# Altium PCB uart_key.PcbDoc
Units mm, origin at the board's own origin, x right, y up, seen from the top; angles counter-clockwise.
Board outline 30 x 30 mm, 2 copper layers (Top Layer, Bottom Layer), stack 1.571 mm thick; 22 components, 20 nets, 73 pads, 23 vias.
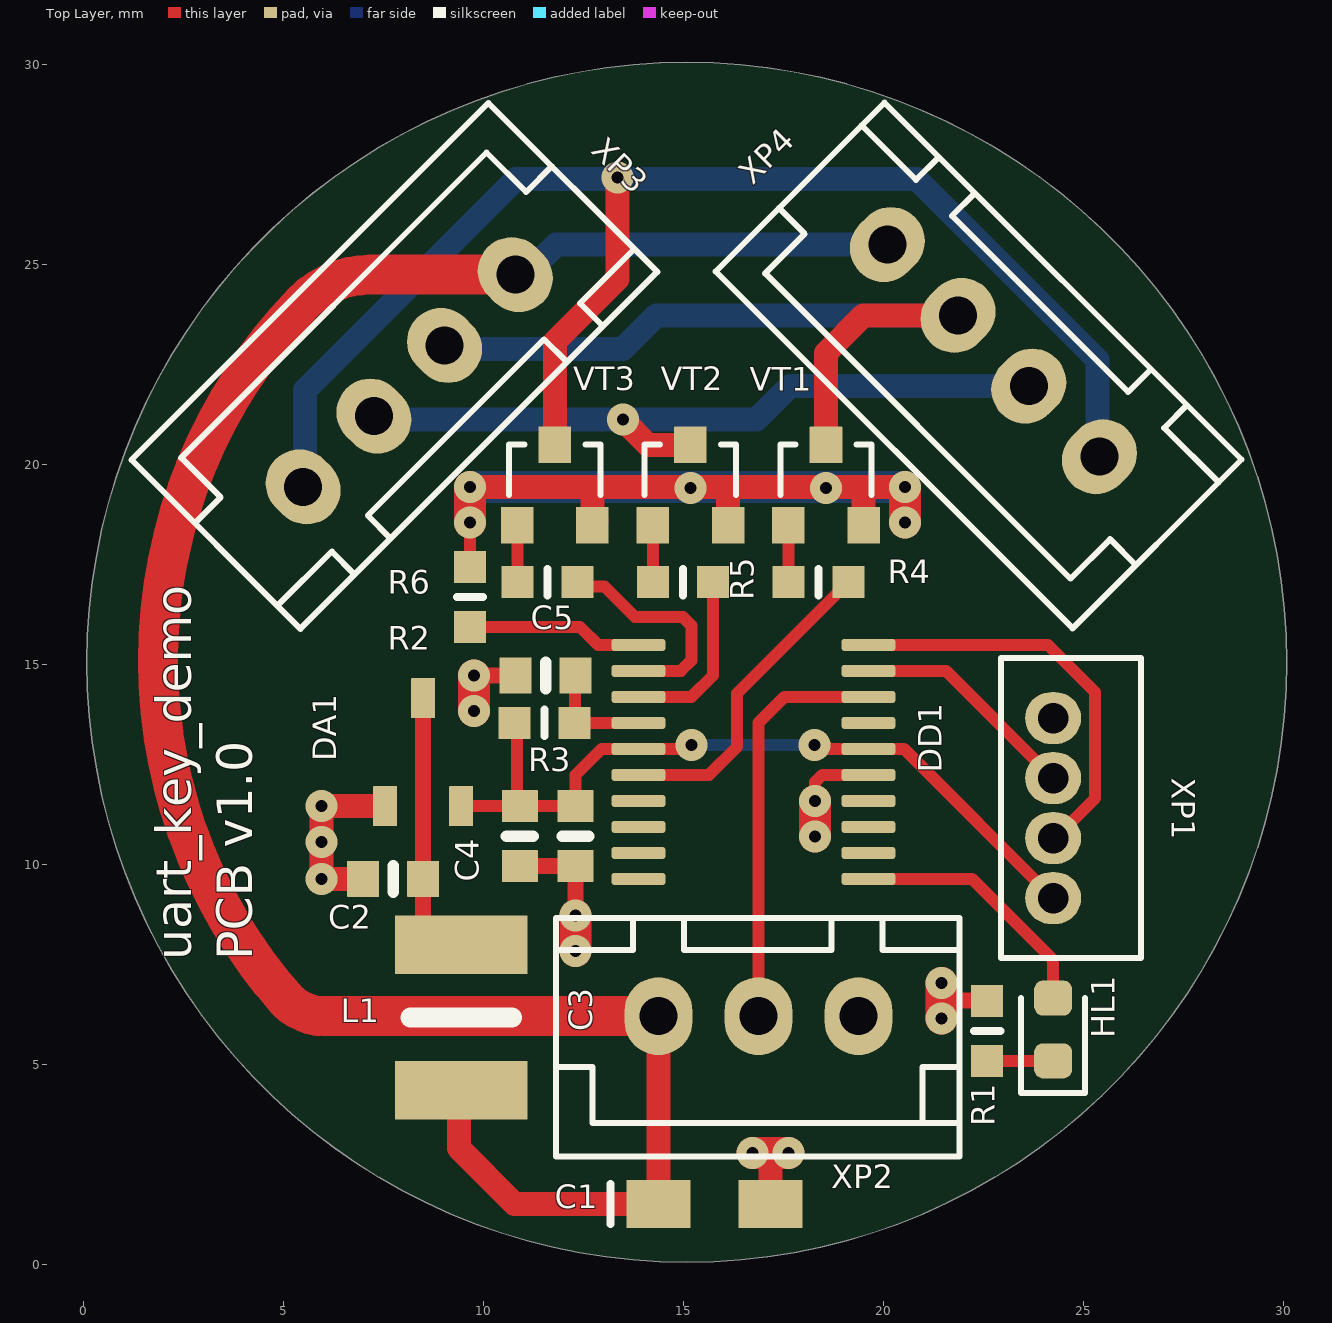
[diagram p0: Top Layer view]
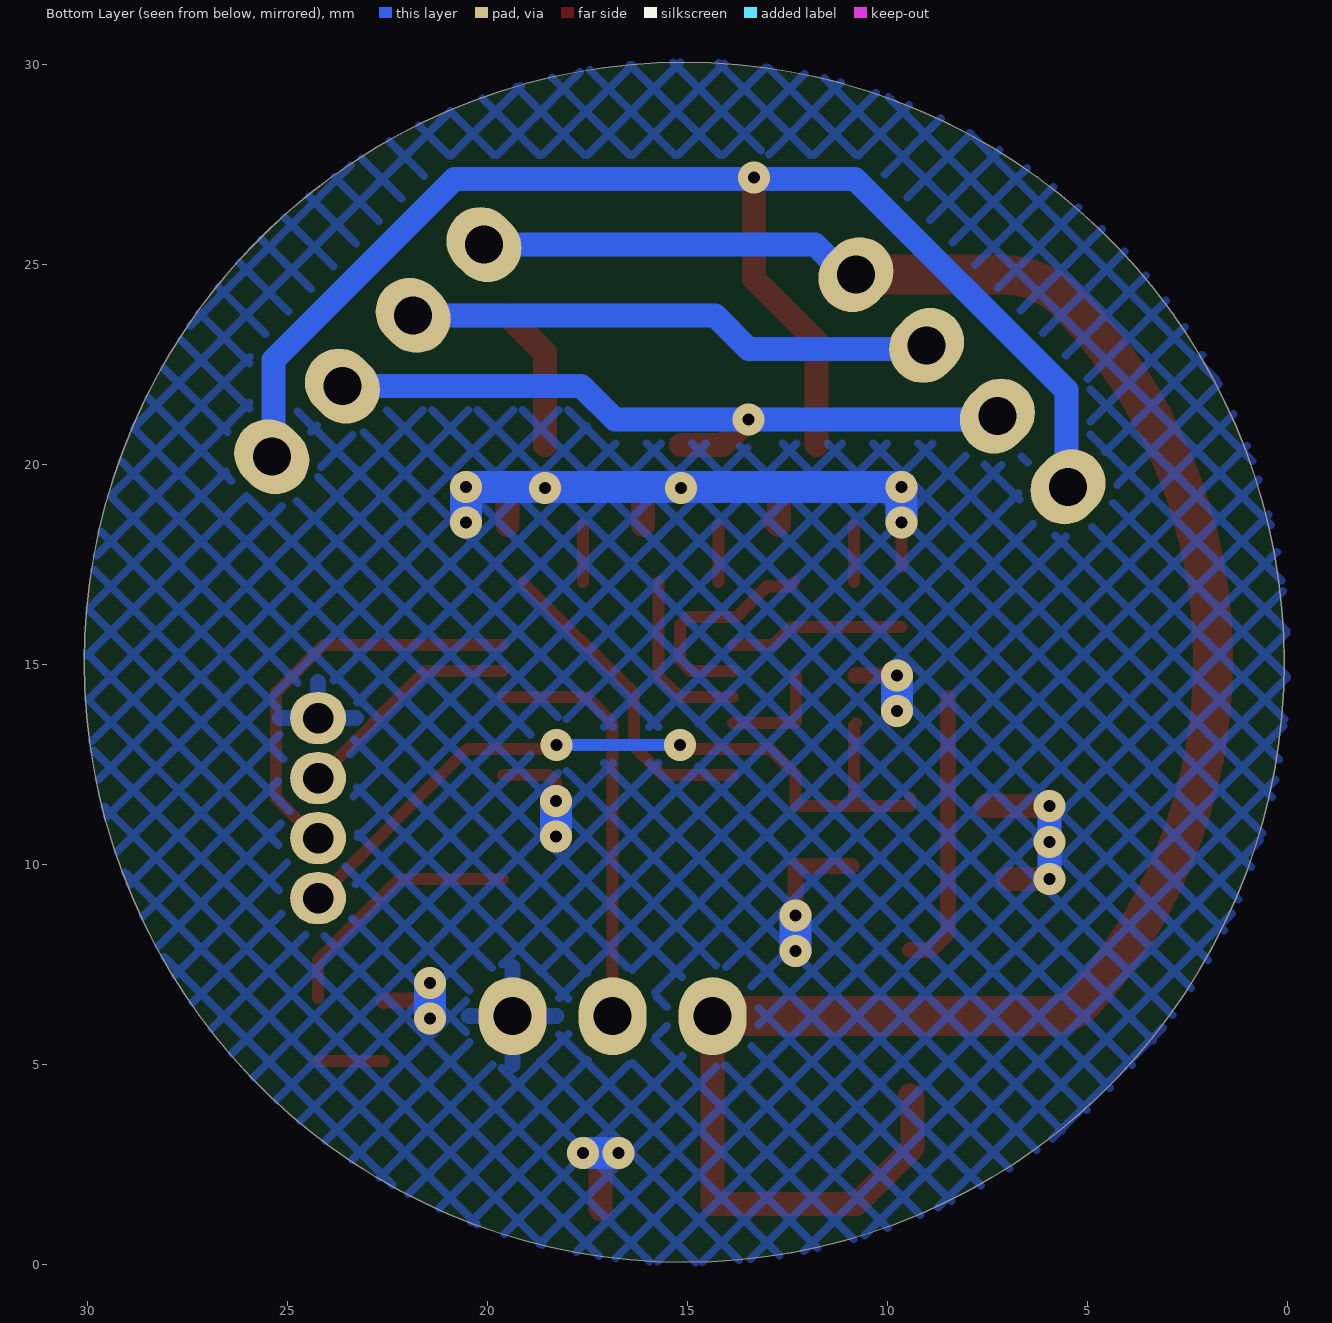
[diagram p1: Bottom Layer view, seen from below]
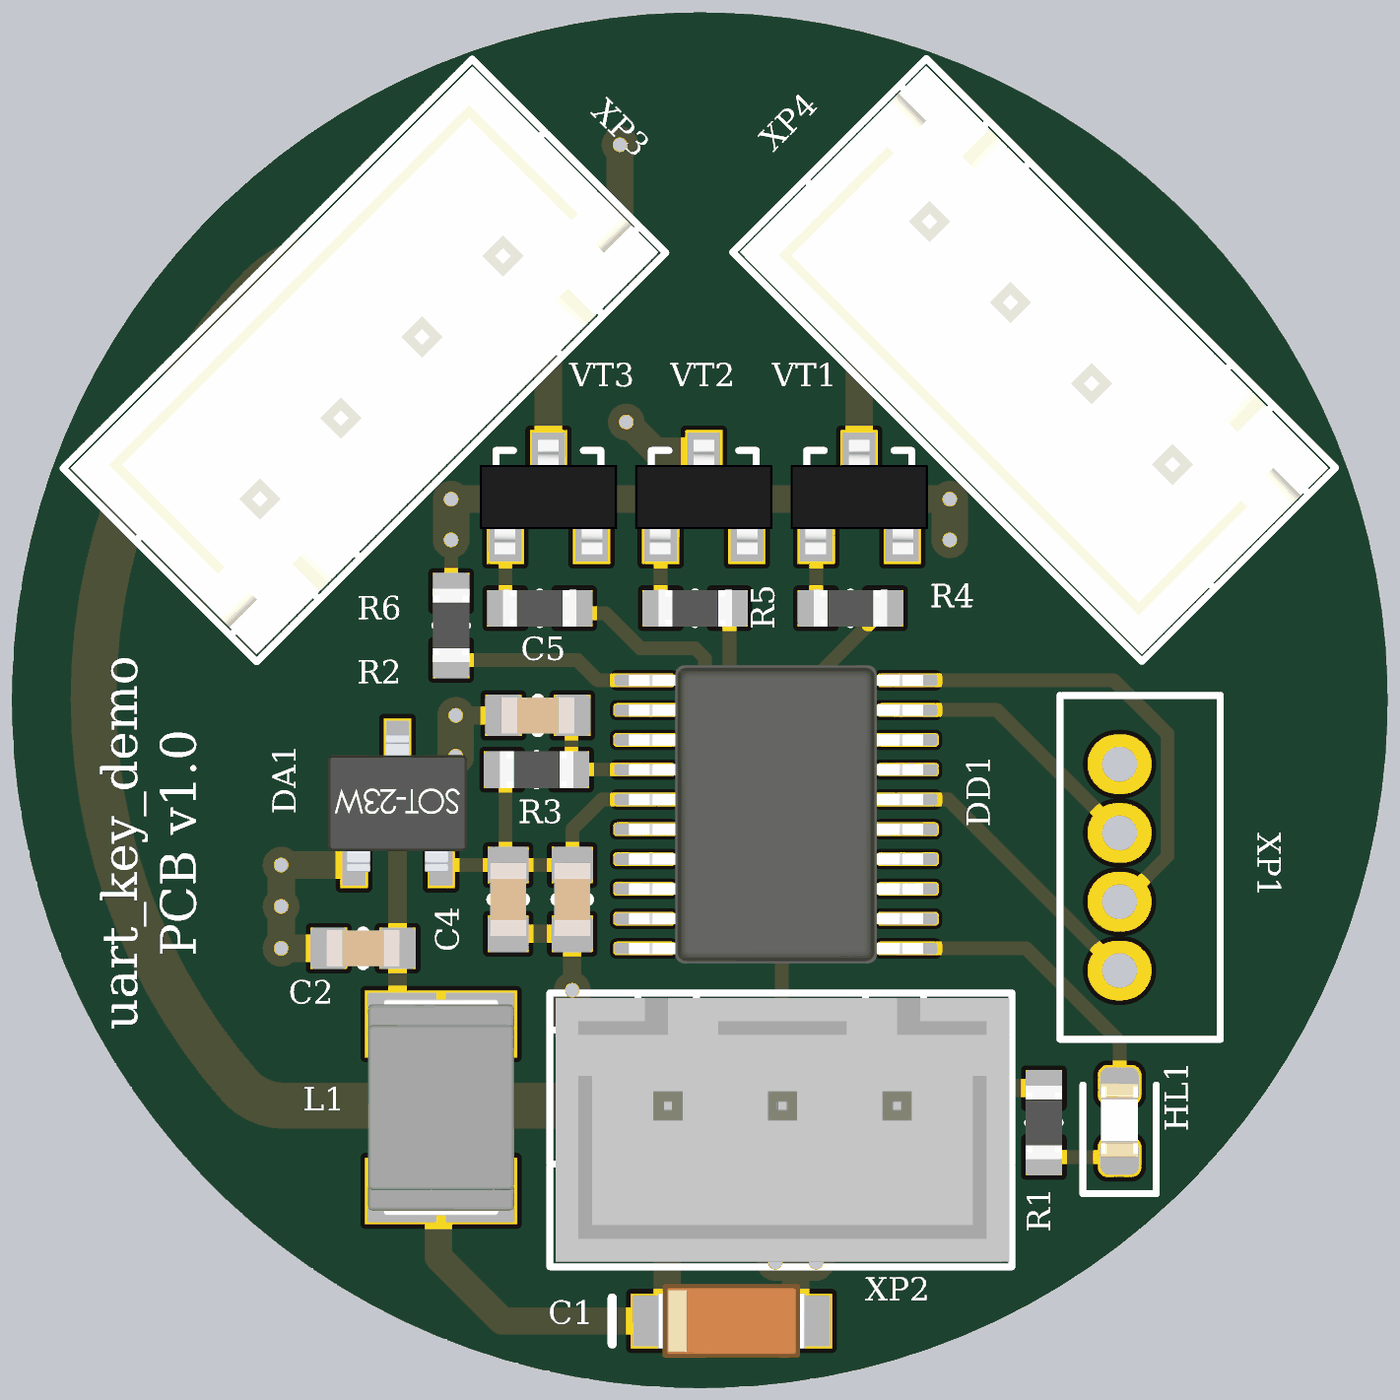
[diagram p2: 3D render of the assembled board from above, using the file's embedded part models]

## Layer stack, top to bottom
Top Solder: solder mask 0.0102, Solder Resist, Dk 3.5
Top Layer: signal copper 0.0356
Dielectric 1: dielectric 1.5, FR-4, Dk 4.8
Bottom Layer: signal copper 0.0356
Bottom Solder: solder mask 0.0102, Solder Resist, Dk 3.5

## Board outline
15.075,0.062 cw(c15.075,15.062) 0.075,15.062 cw(c15.075,15.062) 15.075,30.062 cw(c15.075,15.062) 30.075,15.062 cw(c15.075,15.062)

## Design rules (kind name [scope] priority, off if disabled: settings)
Clearance TestPointToPad [HasFootprint('TP_36_PAD') or HasFootprint('TP_38_PAD') or HasFootprint('TP_47_PAD') or HasFootprint('TP_50_PAD') or HasFootprint('TP_60_PAD') or HasFootprint('TP_80_PAD') or HasFootprint('TP_100_PAD') vs IsPad] p1: gap=0.22 ignorepadtopadclearanceinfootprint=FALSE except(0: Arc-Hole Track-Hole SMDPad-Hole THPad-Hole Via-Hole Fill-Hole Poly-Hole Region-Hole Text-Hole; 2: Arc-THPad Track-THPad SMDPad-THPad THPad-THPad)
Clearance [All] p2: gap=0.2 ignorepadtopadclearanceinfootprint=FALSE
ComponentClearance TestpointClearance [Footprint Like 'TP_36_PAD' or Footprint Like 'TP_38_PAD' or Footprint Like 'TP_47_PAD' or Footprint Like 'TP_50_PAD' or Footprint Like 'TP_60_PAD' or Footprint Like 'TP_80_PAD' or Footprint Like 'TP_100_PAD' vs Footprint Like 'TP_36_PAD' or Footprint Like 'TP_38_PAD' or Footprint Like 'TP_47_PAD' or Footprint Like 'TP_50_PAD' or Footprint Like 'TP_60_PAD' or Footprint Like 'TP_80_PAD' or Footprint Like 'TP_100_PAD'] p1: gap=0 collisioncheckmode=3 verticalgap=0.254 showdistances=FALSE
ComponentClearance [All] p2: gap=0.254 collisioncheckmode=3 verticalgap=0.254 showdistances=FALSE
DiffPairsRouting [All] p1: maxlimit=0.25 minlimit=0.2 mostfreqgap=0.22 toplayer_minwidth=0.2 toplayer_maxwidth=0.25 toplayer_prefwidth=0.22 bottomlayer_minwidth=0.2 bottomlayer_maxwidth=0.25 bottomlayer_prefwidth=0.22 maxuncoupledlength=12.7
HoleSize [All] p1: absolutevalues=TRUE maxlimit=4 minlimit=0.3 maxpercent=80.000 minpercent=20.000
MinimumSolderMaskSliver [All] p1: minsoldermaskwidth=0.1
PasteMaskExpansion [All] p1: expansion=-0.05
PlaneConnect [All] p1: planeconnectstyle=Relief reliefexpansion=0.508 reliefentries=4 reliefconductorwidth=0.4 reliefairgap=0.25
PolygonConnect PolygonConnect_1 [IsVia or InPadClass('Direct')] p1: connectstyle=Direct reliefconductorwidth=0.254 reliefentries=4 polygonreliefangle="90 Angle" airgapwidth=0.254
PolygonConnect [All] p2: connectstyle=Relief reliefconductorwidth=0.4 reliefentries=4 polygonreliefangle="90 Angle" airgapwidth=0.25
RoutingVias [All] p1: holewidth=0.3 width=1 viastyle="Through Hole" minholewidth=0.3 minwidth=0.7 maxholewidth=0.4 maxwidth=2.8
SilkToSilkClearance [All] p1: silktosilkclearance=0.2
SilkToSolderMaskClearance [IsPad] p1: minsilkscreentomaskgap=0.2 clearancetoexposedcopper=TRUE
SolderMaskExpansion [All] p1: expansion=0.1 istentingtop=FALSE
Width [All] p1: maxlimit=4 minlimit=0.22 preferedwidth=0.4
22 further rules are at their usual default settings.

## Components (designator, comment, footprint, x,y, rotation, side; value= is the part's Value field where it differs from the comment)
C1 "2.2uF 16V" TANT_3.2X1.6_A 15.766,1.524 r0 top value=2.2uF
C2 "10uF 25V" CC0603_0.8mm 7.734,9.652 r180 top value=10uF
C3 "10uF 25V" CC0603_0.8mm 12.294,10.718 r270 top value=10uF
C4 "0.15uF 50V" CC0603_0.8mm 10.897,10.718 r270 top value=0.15uF
C5 "1uF 25V" CC0603_0.8mm 11.544,14.732 r180 top value=1uF
DA1 "MCP1703T-3302E/CB" SOT-23A_MCP 8.484,12.818 r270 top value=3.3V
DD1 "STM32F042F6" TSSOP-20_ST 16.739,12.573 r270 top
HL1 "led_1608_green" led_1608 24.232,5.1 r90 top
L1 "LQH43C 15uH" LQH43C 9.434,6.181 r90 top value=15uH
R1 "10k ±1%" R0603 22.581,5.85 r90 top value=10k
R2 "10k ±1%" R0603 9.652,16.693 r270 top value=10k
R3 "10k ±1%" R0603 11.518,13.548 r0 top value=10k
R4 "100 ±1%" R0603 18.363,17.069 r180 top value=100
R5 "100 ±1%" R0603 14.974,17.069 r180 top value=100
R6 "100 ±1%" R0603 11.585,17.069 r180 top value=100
VT1 "IRLML2060" SOT-23 18.553,19.494 r270 top
VT2 "IRLML2060" SOT-23 15.164,19.494 r270 top
VT3 "IRLML2060" SOT-23 11.775,19.494 r270 top
XP1 "ST-Link" B4B-ZR 24.232,9.168 r90 top
XP2 "IN" JST_XH_B3B-XH-A_1x03_P2.50mm_Vertical 14.366,6.216 r0 top
XP3 "LED" JST_XH_B4B-XH-A_1x04_P2.50mm_Vertical 10.785,24.755 r225 top
XP4 "LED" JST_XH_B4B-XH-A_1x04_P2.50mm_Vertical 20.086,25.507 r315 top

## Footprints (in the part's own frame and the unit in brackets; to place one, negate y for a bottom-side part, rotate by r counter-clockwise, add the part's x,y. Pads: shape width x height; smd on the part's side, far side on the other; paste and mask are expansions set on the pad)
B4B-ZR [mm]
  oval 1.3x1.4 hole 0.762: 1(0,0) 2(1.5,0) 3(3,0) 4(4.5,0)
  silkscreen extent -1.5,-2.2 6,1.3, body extent -1.5,-2.2 6,1.3, height 4.5
CC0603_0.8mm [mm] "Yageo/ Radiused inverted home plate (RIHP) paste"
  rrect2% 0.8x0.9 smd paste-2: 1(-0.75,0) 2(0.75,0)
  Top Layer pour cut-out: -0.375,0.65 -0.375,-0.65 0.375,-0.65 0.375,0.65
  silkscreen extent 0,-0.33 0,0.33, body extent -0.8,-0.4 0.8,0.4, height 0.78
JST_XH_B3B-XH-A_1x03_P2.50mm_Vertical [mm]
  oval 1.7x1.95 hole 0.95: 1(0,0) 2(2.5,0) 3(5,0)
  silkscreen extent -2.56,-3.51 7.52,2.46, body extent -2.44,-3.4 7.46,2.35, height 7
JST_XH_B4B-XH-A_1x04_P2.50mm_Vertical [mm]
  oval 1.7x1.95 hole 0.95: 1(0,0) 2(2.5,0) 3(5,0) 4(7.5,0)
  silkscreen extent -2.56,-3.51 10.06,2.46, body extent -2.45,-3.4 9.95,2.35, height 7
led_1608 [mm]
  rrect50% 0.875x0.95 smd: 1(0,0) 2(1.57,0)
  silkscreen extent -0.8,-0.8 1.57,0.8, body extent 0,-0.4 1.6,0.4, height 1.1
LQH43C [mm] "Chip Inductor, 2-Leads, Body 4,50x3,20mm, IPC High Density"
  rect 1.46x3.32 smd paste-25: 1(-1.82,0) 2(1.82,0)
  silkscreen extent 0,-1.27 0,1.27, body extent -2.35,-1.6 2.35,1.6, height 2.6
R0603 [mm]
  rect 0.8x0.8 smd paste-2: 1(-0.75,0) 2(0.75,0)
  Top Layer pour cut-out: -0.5,0.6 0.5,0.6 0.5,-0.6 -0.5,-0.6
  Top Layer pour cut-out: -0.5,0.6 -0.5,-0.6 0.5,-0.6 0.5,0.6
  silkscreen extent 0,-0.33 0,0.33, body extent -0.8,-0.4 0.8,0.4, height 0.37
SOT-23 [mil]
  rrect2% 36x32 smd: 1(39.5,-37) 2(39.5,37) 3(-39.5,0)
  silkscreen extent -40,-45 10,45, body extent -49,-59 49,59, height 43
SOT-23A_MCP [mm] "Посадочное место под SOT-23A. Рекомендации MicroChip"
  rrect2% 1x0.6 smd: 1(1.35,-0.95) 2(1.35,0.95) 3(-1.35,0)
  body extent -1.5,-1.52 1.5,1.52, height 1.32
TANT_3.2X1.6_A [mm]
  rrect2% 1.6x1.2 smd: 1(1.4,0) 2(-1.4,0)
  silkscreen extent -2.6,-0.5 -2.6,0.5, body extent -1.6,-0.8 1.6,0.8, height 1.6
TSSOP-20_ST [mm] "TSSOP, 20-Leads, Body 6.50x4.40mm, Pitch 0.65mm, ST recommend footprint"
  rrect50% 0.3x1.35 smd paste-0.025 mask+0.075: 1(-2.925,-2.875) 2(-2.275,-2.875) 3(-1.625,-2.875) 4(-0.975,-2.875) 5(-0.325,-2.875) 6(0.325,-2.875) 7(0.975,-2.875) 8(1.625,-2.875) 9(2.275,-2.875) 10(2.925,-2.875) 11(2.925,2.875) 12(2.275,2.875) 13(1.625,2.875) 14(0.975,2.875) 15(0.325,2.875) 16(-0.325,2.875) 17(-0.975,2.875) 18(-1.625,2.875) 19(-2.275,2.875) 20(-2.925,2.875)
  body extent -3.25,-3.21 3.25,3.21, height 0.98

## Part data
C1: library part Capacitor_elec, Tolerance=±10%, Voltage=16V, Link1=https://www.chipdip.ru/product0/9000686417, Name=Capacitor_elec, Type="Конденсатор электр."
C2 C3 C5: library part Capacitor, Tolerance=±10%, Voltage=25V, Name=Capacitor, Type="Конденсатор керам."
  C2 C3: Link1=https://www.chipdip.ru/product/grm188r61e106m
  C5: Link1=https://www.chipdip.ru/product/grm188r71e105ka12d
C4: library part Capacitor, Tolerance=±10%, Voltage=50V, Link1=https://www.chipdip.ru/product0/9000081151, Name=Capacitor, Type="Конденсатор керам."
DD1: "ARM-based 32-bit MCU, up to 32 KB Flash, crystal-less USB  FS 2.0, CAN, 8 timers, ADC & comm. interfaces, 2.0 - 3.6 V", Name=STM32F042F6, Type=Микроконтроллер
L1: library part Inductor, Link1=https://www.chipdip.ru/product/lqh43mn150k, Name=LQH43C, Type=Индуктивность
R1 R2 R3 R4 R5 R6: library part Res_0603, Tolerance=±1%, Name=R0603, Type="Резистор SMD"
  R1 R2 R3: Link1=https://www.chipdip.ru/product0/9000079736
  R4 R5 R6: Link1=https://www.chipdip.ru/product0/9000079616
XP1: library part B4B-ZR_conn_01x04_st_link, Circuit_1=Vcc, Circuit_2=CLK, Circuit_3=DIO, Circuit_4=Gnd, Link1=https://www.chipdip.ru/product/b4b-zr, Name=B4B-ZR, Type=Разъём
XP2: library part JST_XH_B3B-XH-A_1x04_P2.50mm_Vertical_1, Circuit_1=+5V, Circuit_2=Rx, Circuit_3=Gnd, Link1=https://www.chipdip.ru/product/sct2501wv-03p-b3b-xh-a, Link2=https://www.chipdip.ru/product/sct2501h-03p-xhp-3, Link3=https://www.chipdip.ru/product/sxh-001t-0.6?from=rec_product, Name=JST_XH_B4B-XH-A_1x04_P2.50mm_Vertical, Type=Разъём
XP3 XP4: library part JST_XH_B4B-XH-A_1x04_P2.50mm_Vertical, Circuit_1=+5Vout, Circuit_2=led_r, Circuit_3=led_g, Circuit_4=led_b, Link1=https://www.chipdip.ru/product/b4b-xh-a, Link2=https://www.chipdip.ru/product/xhp-4?from=rec_product, Link3=https://www.chipdip.ru/product/sxh-001t-0.6?from=rec_product, Name=JST_XH_B4B-XH-A_1x04_P2.50mm_Vertical, Type=Разъём
DA1: Link1=https://www.chipdip.ru/product/mcp1703t-3302e-cb-3, Name=MCP1703T-3302E/CB, Type=LDO
HL1: Link1=https://www.chipdip.ru/product/to-1608bc-pg, Name=led_1608_green, Type=Светодиод
VT1 VT2 VT3: Link1=https://www.chipdip.ru/product/irlml2060trpbf, Name=IRLML2060, Type="MOSFET N-chanel"

## Via types
v1: diameter 0.8, hole 0.3, Top Layer to Bottom Layer, tented both sides, 23 vias

## Nets (pads, with @x,y where several pads share a name; then routed paths per layer and width w, separated by ;. In a path a pad name is that pad's centre, name@x,y a point inside that pad or via, vN(x,y) a via of type N, cw(c..) or ccw(c..) an arc to the next point about the centre after c; other vN are vias at no path point)
+3.3V: C3.1 C4.1 DA1.2 DD1.5 DD1.16 R3.1 XP1.1 | length 19.9
  Top Layer w0.3: DA1.2@9.434,11.668 DA1.2 C4.1 ; R3.1 10.832,13.484 10.832,11.532 C4.1 ; v1(15.189,12.998) 15.054,12.998 14.954,12.898 12.944,12.898 12.294,12.248 C3.1 C4.1 ; v1@18.27,13.124 18.405,13.124 18.632,12.898 20.502,12.898 XP1.1
  Bottom Layer w0.3: v1(15.189,12.998) v1(18.27,12.998)
+5V: C1.2 L1.1 XP2.1 XP3.1 XP4.1 | length 55.3
  Top Layer w0.6: L1.1@9.434,4.234 9.373,4.173 9.373,2.921 10.77,1.524 C1.2 XP2.1
  Top Layer w1: XP3.1 7.149,24.755 ccw(c7.149,22.404) 5.487,24.066 ccw(c14.694,15.116) 5.08,6.604 ccw(c6.017,7.541) 6.017,6.216 XP2.1
  Bottom Layer w0.6: XP3.1 11.057,24.755 11.809,25.507 XP4.1
CLK: DD1.20 XP1.2 | length 10.3
  Top Layer w0.3: DD1.20 24.101,15.498 25.282,14.317 25.282,11.668 24.282,10.668 XP1.2
DIO: DD1.19 XP1.3 | length 5.7
  Top Layer w0.3: DD1.19 21.552,14.848 XP1.3
GND: C1.1 C2.2 C3.2 C4.2 C5.2 DA1.1 DD1.15 R1.2 R2.1 VT1.2 VT2.2 VT3.2 XP1.4 XP2.3 | length 52.7
  Top Layer w0.3: R2.1 v1(9.652,18.559) ; v1(18.283,11.598) 18.283,12.072 18.459,12.248 DD1.15
  Top Layer w0.4: v1(9.754,14.732) C5.2 ; C4.2 C3.2 v1(12.294,8.738) ; v1(18.283,10.709) v1@18.392,10.709 ; v1(21.438,6.156) v1@21.546,6.156 ; 21.438,6.604 22.577,6.604 R1.2
  Top Layer w0.6: C2.2 v1(5.944,9.652) v1(5.944,10.566) v1(5.944,11.468) DA1.1 ; v1(9.652,19.448) 12.715,19.448 ; VT3.2@12.821,18.598 VT3.2 12.715,19.448 ; VT2.2 16.104,19.289 ; C1.1@17.166,1.397 C1.1 17.166,2.8 ; VT1.2 19.493,19.448 ; v1(20.528,19.448) 19.493,19.448 ; 12.715,19.448 19.493,19.448
  Top Layer w0.8: v1(9.652,18.559) v1(9.652,19.448) ; v1(9.754,13.843) v1(9.754,14.732) ; v1(12.294,7.849) v1(12.294,8.738) ; v1(16.721,2.8) 17.166,2.8 v1(17.61,2.8) ; v1(18.283,10.709) v1(18.283,11.598) ; v1(20.528,18.559) v1(20.528,19.448) ; v1(21.438,6.156) 21.438,6.604 v1(21.438,7.044)
  Bottom Layer w0.6: v1(5.944,9.652) v1(5.944,10.566) v1(5.944,11.468)
  Bottom Layer w0.8: v1(9.652,18.559) v1(9.652,19.448) v1(20.528,19.448) v1(20.528,18.559) ; v1(9.754,13.843) v1(9.754,14.732) ; v1(12.294,7.849) v1(12.294,8.738) ; v1(16.721,2.8) v1(17.61,2.8) ; v1(18.283,10.709) v1(18.283,11.598) ; v1(21.438,6.156) v1(21.438,7.044)
  other v1: 15.164,19.423 18.553,19.423
led_b_on: DD1.2 R6.1 | length 5.6
  Top Layer w0.3: R6.1 12.441,16.963 13.009,16.963 13.779,16.193 14.979,16.193 15.189,15.982 15.189,15.113 14.924,14.848 DD1.2
led_b_power: VT3.3 XP3.4 XP4.4 | length 36.1
  Top Layer w0.6: VT3.3 11.775,23.082 13.335,24.642 v1(13.335,27.178)
  Bottom Layer w0.6: XP3.4 5.527,19.497 5.527,21.866 10.806,27.145 20.817,27.145 25.344,22.618 25.344,20.249 XP4.4
led_g_on: DD1.3 R5.1 | length 4.4
  Top Layer w0.3: DD1.3 15.189,14.198 15.723,14.732 R5.1@15.723,17.068
led_g_power: VT2.3 XP3.3 XP4.3 | length 18.7
  Top Layer w0.6: v1(13.472,21.131) 14.105,20.498 VT2.3
  Bottom Layer w0.6: XP3.3 7.338,21.131 v1(13.472,21.131) 16.813,21.131 17.653,21.971 XP4.3
led_r_on: DD1.6 R4.1 | length 8
  Top Layer w0.3: DD1.6 15.626,12.248 16.332,12.954 16.332,14.288 R4.1
led_r_power: VT1.3 XP3.2 XP4.2 | length 19.2
  Top Layer w0.6: VT1.3 18.553,22.799 19.493,23.739 XP4.2
  Bottom Layer w0.6: XP3.2 9.34,22.987 9.429,22.899 13.472,22.899 14.312,23.739 XP4.2
NetC2_1: C2.1 DA1.3 L1.2 | length 7
  Top Layer w0.4: DA1.3 C2.1 8.484,8.304 8.914,7.874 L1.2@9.434,7.874
NetC5_1: C5.1 DD1.4 R3.2 | length 2.8
  Top Layer w0.3: C5.1 12.281,14.719 12.281,13.561 12.294,13.548 DD1.4
NetDD1_1: DD1.1 R2.2 | length 4.4
  Top Layer w0.3: R2.2 12.408,15.943 12.852,15.498 DD1.1
NetDD1_11: DD1.11 HL1.2 | length 6.4
  Top Layer w0.3: DD1.11 22.204,9.648 24.232,7.62 HL1.2
NetHL1_1: HL1.1 R1.1 | length 1.7
  Top Layer w0.3: R1.1 HL1.1
NetR4_2: R4.2 VT1.1 | length 1.4
  Top Layer w0.3: R4.2 VT1.1
NetR5_2: R5.2 VT2.1 | length 1.4
  Top Layer w0.3: R5.2 VT2.1
NetR6_2: R6.2 VT3.1 | length 1.4
  Top Layer w0.3: R6.2 VT3.1
rx: DD1.18 XP2.2 | length 10.3
  Top Layer w0.3: XP2.2 16.866,13.548 17.516,14.198 DD1.18
pads on no net: DD1.7 DD1.8 DD1.9 DD1.10 DD1.12 DD1.13 DD1.14 DD1.17

## Polygon pours and split planes (outlines as drawn)
GND on Bottom Layer "GND_L02_P000" (hatched 45Degree grid 0.8 track 0.203, remove dead copper, pour order 0): 0.008,15.062 ccw(c15.008,15.062) 15.008,0.062 ccw(c15.008,15.062) 30.008,15.062 ccw(c15.008,15.062) 15.008,30.062 ccw(c15.008,15.062)

## Silkscreen, mask and mechanical layers (free items; w line width, h text height)
Top Overlay:
  text "uart_key_demo / PCB v1.0" at 4.514,7.62 h1.52 r90
Mechanical 1:
  circle w0.15: c15.075,15.062 r15